# Altium PCB Front Power Distribution.PcbDoc (part 2 of 2)
Units mm, origin at the board's own origin, x right, y up, seen from the top; angles counter-clockwise.
Board outline 77 x 90 mm, 2 copper layers (Top Layer, Bottom Layer); 113 components, 89 nets, 463 pads, 547 vias.
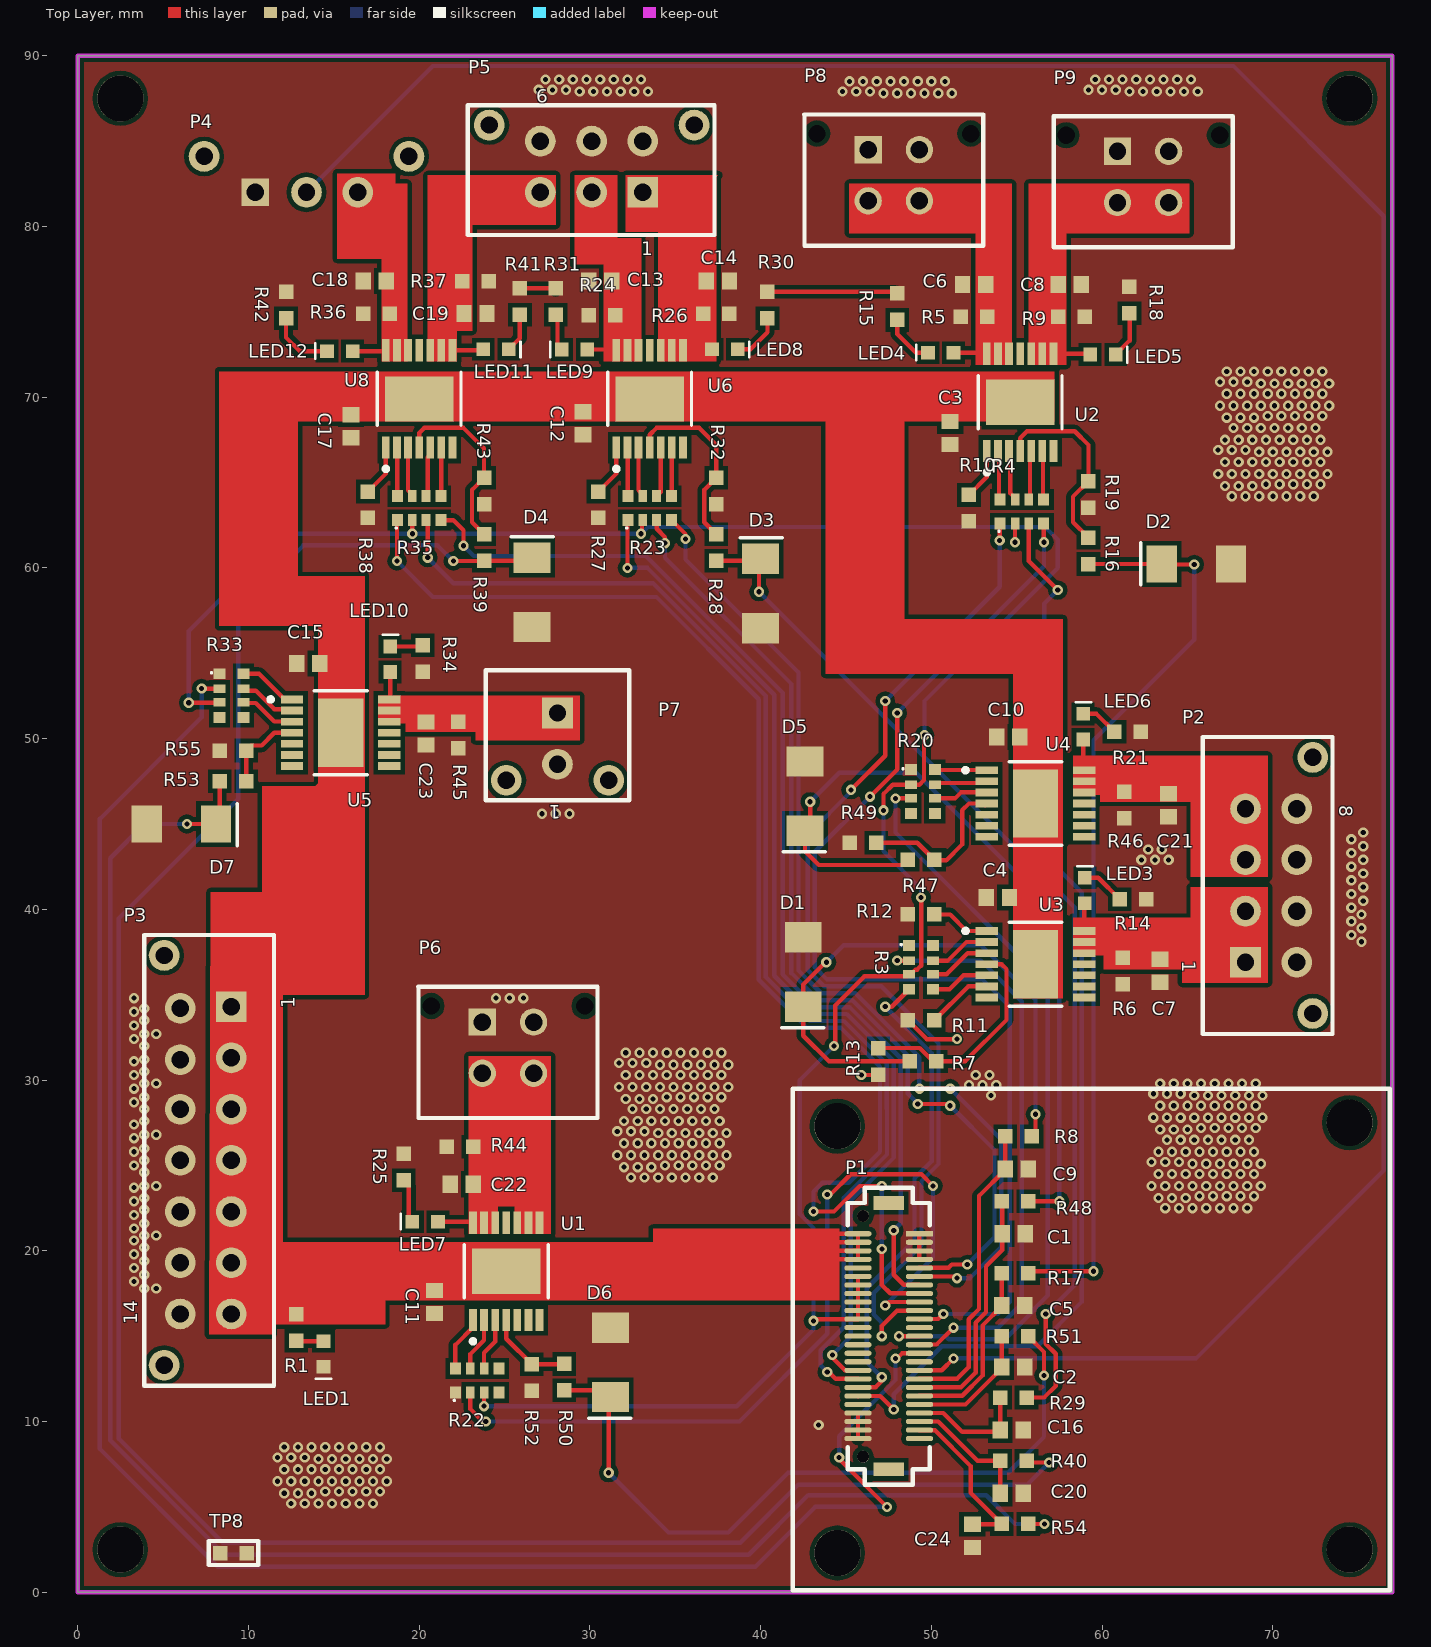
[diagram p0: Top Layer view]

## Via types
v1: diameter 0.6, hole 0.3, Top Layer to Bottom Layer, tented both sides, 547 vias

## Nets (pads, with @x,y where several pads share a name; then routed paths per layer and width w, separated by ;. In a path a pad name is that pad's centre, name@x,y a point inside that pad or via, vN(x,y) a via of type N, cw(c..) or ccw(c..) an arc to the next point about the centre after c; other vN are vias at no path point) (continued)
NetR16_2: (continued)
  Top Layer w0.254: U2.4 55.2,67.6 55.6,68 58.4,68 59.2,67.2 R19.1 58.3,64.175 58.3,62.675 R16.2
NetR20_6: R20.6 U4.3 | length 3.2
  Top Layer w0.254: R20.6 51.385,46.5 51.735,46.85 U4.3
NetR20_7: R20.7 U4.2 | length 3.1
  Top Layer w0.254: R20.7 50.302,47.402 53.152,47.402 U4.2
NetR20_8: R20.8 U4.1 | length 3.1
  Top Layer w0.254: R20.8 50.215,48.165 53.235,48.165 U4.1
NetR22_6: R22.6 U1.3 | length 3.1
  Top Layer w0.254: R22.6 23.8,14.035 24.45,14.685 U1.3
NetR22_7: R22.7 U1.2 | length 3.2
  Top Layer w0.254: R22.7 23,13.96 23.8,14.76 U1.2
NetR22_8: R22.8 U1.1 | length 3.3
  Top Layer w0.254: R22.8 22.12,14.49 23.15,15.52 U1.1
NetR23_5: R23.5 U6.6 | length 2.9
  Top Layer w0.254: R23.5 34.79,64.21 34.79,67.04 U6.6
NetR23_6: R23.6 U6.5 | length 3
  Top Layer w0.254: R23.6 34.15,64.45 U6.5
NetR23_7: R23.7 U6.3 | length 3
  Top Layer w0.254: U6.3 32.85,64.55 33.1,64.3 R23.7
NetR23_8: R23.8 U6.2 | length 2.9
  Top Layer w0.254: U6.2 32.21,67.04 32.21,64.21 R23.8
NetR27_1: R27.1 U6.1 | length 3
  Top Layer w0.254: R27.1 31.55,65.525 U6.1
NetR28_2: R28.2 R32.1 U6.4 | length 11
  Top Layer w0.254: U6.4 33.5,67.8 33.9,68.2 36.4,68.2 37.4,67.2 R32.1 36.696,64.571 36.696,62.679 R28.2
NetR33_6: R33.6 U5.3 | length 3.3
  Top Layer w0.254: R33.6 9.734,52.086 10.431,52.086 11.514,51.003 12.541,51.003 U5.3
NetR33_7: R33.7 U5.2 | length 3.4
  Top Layer w0.254: R33.7 9.809,52.811 10.431,52.811 11.514,51.728 12.466,51.728 U5.2
NetR33_8: R33.8 U5.1 | length 3.5
  Top Layer w0.254: R33.8 10.614,53.8 12.12,52.294 U5.1
NetR35_5: R35.5 U8.6 | length 2.9
  Top Layer w0.254: R35.5 21.29,64.21 21.29,67.04 U8.6
NetR35_6: R35.6 U8.5 | length 3
  Top Layer w0.254: R35.6 20.504,64.304 20.504,66.474 20.65,66.62 U8.5
NetR35_7: R35.7 U8.3 | length 3
  Top Layer w0.254: U8.3 19.35,64.55 19.6,64.3 R35.7
NetR35_8: R35.8 U8.2 | length 2.9
  Top Layer w0.254: U8.2 18.71,67.04 18.71,64.21 R35.8
NetR38_1: R38.1 U8.1 | length 3
  Top Layer w0.254: R38.1 18.05,65.525 U8.1
NetR39_2: R39.2 R43.1 U8.4 | length 10.9
  Top Layer w0.254: U8.4 20,67.9 20.3,68.2 22.6,68.2 23.8,67 R43.1 23.096,64.571 23.096,62.679 R39.2
NetR47_2: R47.2 R49.1 U4.4 | length 9.5
  Top Layer w0.254: R49.1 49.175,43.9 R47.2 ; R47.2@50.275,42.87 50.87,42.87 51.8,43.8 51.8,45.8 52.2,46.2 U4.4 U4.4@53.152,46.102
NetR50_2: R50.2 R52.1 U1.4 | length 5.1
  Top Layer w0.254: U1.4 25.1,14.85 R52.1 28.475,13.35 R50.2
NetR53_2: R53.2 R55.1 U5.4 | length 4.9
  Top Layer w0.254: R53.2 R55.1 10.173,49.598 10.773,49.598 11.514,50.339 12.544,50.339 U5.4
PA1_DVR_DISP_IS: C24.1 P1.24 R54.1 | length 9.8
  Top Layer w0.254: P1.24 49.309,9.491 50.209,9.491 52.3,7.4 52.3,5.825 R54.1@54.125,4 ; C24.1 54.104,3.975 R54.1
PA2_CTR_CSL_FAN_IS: C20.1 P1.23 R40.1 | length 7.6
  Top Layer w0.254: P1.23 50.4,10 52.7,7.7 R40.1 C20.1
PA3_STR_PDL_IS: C16.1 P1.22 R29.1 | length 7.1
  Top Layer w0.254: P1.22 50.7,10.5 51.8,9.4 C16.1@54.025,9.4 ; C16.1 R29.1
PA4_HORN_IS: C2.1 P1.21 R51.1 | length 7.6
  Top Layer w0.254: P1.21 52,11 C2.1@54.163,13.163 ; C2.1@54.125,13.15 C2.1 R51.1
PA5_FRONT_TURN_LIGHT_IS: C5.1 P1.20 R17.1 | length 10.7
  Top Layer w0.254: P1.20 49.309,11.509 51.809,11.509 53,12.7 53,15.625 54.125,16.75 C5.1 R17.1
PA6_DAYTIME_IS: C1.1 P1.19 R48.1 | length 14.3
  Top Layer w0.254: P1.19 49.309,12.009 51.735,12.009 52.594,12.868 52.594,15.794 53.2,16.4 53.2,19.1 54.15,20.05 C1.1 54.15,22.875 R48.1
PA7_PARK_LIGHT_IS: C9.1 P1.18 R8.1 | length 17.6
  Top Layer w0.254: P1.18 49.309,12.509 51.509,12.509 52.188,13.188 52.188,15.988 52.794,16.594 52.794,23.219 54.325,24.75 C9.1 R8.1
PA8_CENTER_CONSOLE_EN: P1.7 R35.4 | length 64.8
  Top Layer w0.254: R35.4 22,62.8 22.6,62.2 v1(22.6,61.3) ; v1(47.8,21.2) 47.8,18.594 48.385,18.009 49.291,18.009 P1.7
  Bottom Layer w0.254: v1(22.6,61.3) 23.2,60.7 33.274,60.7 41.3,52.674 41.3,36.19 43.214,34.276 45.213,34.276 48.213,31.276 48.213,21.613 v1(47.8,21.2)
PA9_PEDAL_EN: P1.6 R23.4 | length 58.4
  Top Layer w0.254: R23.4 35.6,61.98 v1(35.6,61.69) ; P1.6 51.4,18.5 v1(51.5,18.4) ; v1(49.3,29.5) v1(51.1,29.5)
  Bottom Layer w0.254: v1(35.6,61.69) 35.6,60.5 42.219,53.881 42.219,36.42 43.551,35.088 45.549,35.088 49.3,31.337 v1(49.3,29.5) ; v1(51.1,29.5) 54.1,26.5 54.1,20.237 52.263,18.4 v1(51.5,18.4)
PA10_STEERING_EN: P1.5 R23.3 | length 57.6
  Top Layer w0.254: R23.3 33.913,62.787 33.913,62.287 34.4,61.8 v1(34.4,61.45) ; v1(49.2,28.6) 51,28.6 v1(51.1,28.5) ; P1.5 49.309,19.009 51.009,19.009 51.2,19.2 v1(52.1,19.2)
  Bottom Layer w0.254: v1(34.4,61.45) 34.4,60.6 41.8,53.2 41.8,36.264 43.382,34.682 45.381,34.682 48.619,31.444 48.619,29.218 49.2,28.637 v1(49.2,28.6) ; v1(51.1,28.5) 53.694,25.906 53.694,20.794 v1(52.1,19.2)
Park_Light_PWR: C7.1 LED3.1 P2.1 P2.2 R6.1 U3.12 U3.13 U3.14 | length 1.6
  Top Layer w0.254: U3.14 58.95,40.31 LED3.1
PB0_FAN_PWM: P1.17 P4.2 | length 157.8
  Top Layer w0.254: P1.17 49.309,13.009 50.609,13.009 v1(51.3,13.7)
  Bottom Layer w0.254: P4.2 20.8,89.4 67.7,89.4 76.5,80.6 76.5,24.7 65.5,13.7 v1(51.3,13.7)
PB2_DVR_DISP_EN: P1.15 R33.2 | length 111.2
  Top Layer w0.254: v1(7.26,52.94) 7.28,52.92 R33.2 ; v1(44.6,7.9) 44.6,7.8 v1(47.4,5) ; v1(47.9,13.7) 47.994,13.7 48.285,13.991 49.291,13.991 P1.15
  Bottom Layer w0.254: v1(7.26,52.94) 7.26,51.26 1.3,45.3 1.3,8.4 8.2,1.5 39.7,1.5 43.2,5 v1(47.4,5) ; v1(44.6,7.9) 44.6,9.137 47.9,12.437 v1(47.9,13.7)
PB6_STR_PDL_DSEL: P1.34 R23.1 | length 60.7
  Top Layer w0.254: v1(32.2,60) 32.2,62.78 R23.1 ; v1(44.2,13.9) 44.266,13.834 44.266,13.677 44.935,13.009 45.691,13.009 P1.34
  Bottom Layer w0.254: v1(32.2,60) 33.374,60 40.801,52.573 40.801,36.115 43.046,33.87 45.044,33.87 47.8,31.114 47.8,28.503 47.806,28.497 47.806,25.469 45.269,22.932 45.269,14.969 v1(44.2,13.9)
PB7_CTR_CSL_FAN_DSEL: P1.33 R35.3 | length 72.8
  Top Layer w0.254: R35.3 20.5,62.7 v1(20.5,60.6) ; v1(43.9,12.9) 43.994,12.9 44.394,12.5 P1.33
  Bottom Layer w0.254: v1(20.5,60.6) 22,59.1 33.7,59.1 40.3,52.5 40.3,36.042 42.878,33.464 44.876,33.464 47.394,30.946 47.394,28.335 47.4,28.329 47.4,25.637 44.863,23.1 44.863,15.526 43.519,14.182 43.519,13.281 v1(43.9,12.9)
PB8_PARK_LIGHT_DSEL: P1.32 R3.4 | length 28.4
  Top Layer w0.254: P1.32 45.709,12.009 46.734,12.009 47.125,12.4 47.125,12.575 v1(47.1,12.6) ; v1(47.3,34.3) 47.68,34.3 R3.4
  Bottom Layer w0.254: v1(47.1,12.6) 46.213,13.487 46.213,17.813 49.013,20.613 49.013,24.25 50.013,25.25 50.013,31.587 v1(47.3,34.3)
PB9_FRONT_TURN_LIGHT_DSEL: P1.31 R4.3 | length 64.1
  Top Layer w0.254: P1.31@45.709,11.491 P1.31 47,11.5 v1(47.8,10.7) ; R4.3 55.7,60.4 v1(57.4,58.7)
  Bottom Layer w0.254: v1(47.8,10.7) 47.8,11.6 50.613,14.413 56.213,14.413 58.8,17 58.8,41 56.612,43.188 56.612,57.912 v1(57.4,58.7)
PB10_PARK_LIGHT_EN: P1.14 R3.2 | length 33.7
  Top Layer w0.254: v1(48,37) R3.2 ; P1.14 49.309,14.509 50.309,14.509 v1(51.3,15.5)
  Bottom Layer w0.254: v1(48,37) 52.9,37 55.3,34.6 55.3,16.9 53.9,15.5 v1(51.3,15.5)
PB11_DAYTIME_EN: P1.13 R20.3 | length 44.8
  Top Layer w0.254: v1(47.9,46.5) R20.3 ; v1(48.1,15) P1.13
  Bottom Layer w0.254: v1(47.9,46.5) 47.9,44.5 56.819,35.581 56.819,17.382 56.019,16.582 56.019,16.519 54.319,14.819 51.018,14.819 50.837,15 v1(48.1,15)
PB12_FRONT_RIGHT_TURN_EN: P1.11 R4.4 | length 67
  Top Layer w0.254: v1(46.4,46.6) 48,48.2 v1(48,51.5) ; P1.11 49.309,16.009 50.409,16.009 v1(50.7,16.3) ; R4.4 56.59,62.59 56.59,61.51 v1(56.6,61.5)
  Bottom Layer w0.254: v1(46.4,46.6) 43.169,43.369 43.169,36.618 43.887,35.9 53,35.9 54.6,34.3 54.6,17 53.9,16.3 v1(50.7,16.3) ; v1(48,51.5) 56.6,60.1 v1(56.6,61.5)
PB13_FRONT_LEFT_TURN_EN: P1.10 R4.1 | length 62.3
  Top Layer w0.254: v1(45.3,47) 47.3,49 v1(47.3,52.2) ; v1(47.1,15) 47.1,15.6 47.991,16.491 49.291,16.491 P1.10 ; v1(54,61.6) 54.01,61.61 54.01,62.59 R4.1
  Bottom Layer w0.254: v1(45.3,47) 45.3,46.9 42.763,44.363 42.763,36.45 43.719,35.494 47.069,35.494 50.419,32.144 50.419,25.082 49.419,24.082 49.419,20.319 46.619,17.519 46.619,16.281 47.1,15.8 v1(47.1,15) ; v1(47.3,52.2) 54,58.9 v1(54,61.6)
PB14_HORN_EN: P1.9 R22.2 | length 49.7
  Top Layer w0.254: R22.2 23,10.737 23.671,10.066 23.834,10.066 v1(23.9,10) ; v1(43.9,23.3) 44.1,23.3 45.281,24.481 49.419,24.481 v1(50.1,23.8) ; v1(47.3,16.8) 47.5,17 P1.9
  Bottom Layer w0.254: v1(23.9,10) 38.763,10 43.9,15.137 v1(43.9,23.3) ; v1(47.3,16.8) 50.1,19.6 v1(50.1,23.8)
PB15_FAN_EN: P1.8 R35.1 | length 76.4
  Top Layer w0.254: v1(18.7,60.4) 18.7,62.78 R35.1 ; v1(43.1,22.3) 44.3,22.3 45.8,23.8 v1(47.1,23.8) ; v1(47.1,20.1) 47.1,18 47.591,17.509 49.291,17.509 P1.8
  Bottom Layer w0.254: v1(18.7,60.4) 20.8,58.3 33.9,58.3 39.894,52.306 39.894,35.874 42.71,33.058 44.708,33.058 46.988,30.778 46.988,25.799 45.17,23.981 43.618,23.981 43.219,23.582 43.219,23.571 43.1,23.452 v1(43.1,22.3) ; v1(47.1,20.1) v1(47.1,23.8)
Pedal_PWR: C13.1 LED9.1 P5.2 R24.1 U6.12 U6.13 U6.14 | length 1.7
  Top Layer w0.254: LED9.1 31.51,72.79 U6.14
Steering_PWR: C14.1 LED8.1 P5.1 R26.1 U6.8 U6.9 U6.10 | length 1.7
  Top Layer w0.254: U6.8 37.09,72.75 LED8.1
VBAT: C3.1 C4.1 C10.1 C11.1 C12.1 C15.1 C17.1 P1.47 P1.48 P1.49 P1.50 P3.1 P3.2 P3.3 P3.4 P3.5 P3.6 P3.7 R1.1 U1.15 U2.15 U3.15 U4.15 U5.15 U6.15 U8.15 | length 10.5
  Top Layer w0.254: 43.4,20.5 P1.49 ; 43.4,21.1 43.5,21 P1.50 P1.49 ; 43.5,19.6 43.6,19.5 P1.47 P1.48 ; 43.6,20.1 43.7,20 P1.48 ; P1.48 P1.49
pads on no net: P1. P1.12 P1.16 P1.25 P1.30 P1.35 P1.36 P1.37 P1.38 P1.39 P1.46 P2.0 P3.0 P4.0 P5.0 P6. P7.0 P8. P9. R3.1 R3.8 R20.4 R20.5 R22.4 R22.5 R33.4 R33.5 U1.5 U1.6 U1.7 U1.11 U2.7 U2.11 U3.7 U3.8 U3.9 U3.10 U3.11 U4.5 U4.6 U4.7 U4.8 U4.9 U4.10 U4.11 U5.5 U5.6 U5.7 U5.8 U5.9 U5.10 U5.11 U6.7 U6.11 U8.7 U8.11

## Polygon pours and split planes (outlines as drawn)
GND on Bottom Layer "Bottom Layer-No Net" (solid, pour order 0): 0,90 0,0 77,0 77,90
GND on Top Layer "Top Layer-No Net" (solid, pour order 10): 0,0 77,0 77,90 0,90

## Keep-outs
Keep-Out Layer:
  the board outline again, w0.254

## Other copper
Top Layer:
  region net VBAT: 54.8,34.8 57.7,34.8 57.7,57 48.4,57 48.4,68.7 43.8,68.7 43.8,53.8 54.8,53.8
  region net VBAT: 44.6,20.5 44.6,21.3 33.7,21.3 33.7,20.5
  region net VBAT: 7.7,15.1 11.4,15.1 11.4,15.7 18,15.7 18,17.1 44.6,17.1 44.6,20.5 12,20.5 12,35 16.8,35 16.8,59.5 12.9,59.5 12.9,68.6 57.2,68.6 57.2,71.5 8.3,71.5 8.3,56.6 14.1,56.6 14.1,47.4 13.9,47.2 10.8,47.2 10.8,41 7.8,41
  region net Park_Light_PWR: 58.3,37.3 60.1,37.3 60.1,36.5 64.7,36.5 64.7,35.7 69.7,35.7 69.7,41.3 65.2,41.3 65.2,39.5 58.3,39.5
  region net Daytime_PWR: 58.3,49 58.3,46.7 59.9,46.7 59.9,46.3 65.2,46.3 65.2,41.9 69.7,41.9 69.7,49
  region net Front_Right_Turn_Light_PWR: 55.7,71.9 57.9,71.9 57.9,79.6 65.1,79.6 65.1,82.5 55.7,82.5
  region net Front_Left_Turn_Light_PWR: 45.2,82.5 45.2,79.6 52.6,79.6 52.6,71.9 54.7,71.9 54.7,82.5
  region net Steering_PWR: 32.1,83 37.5,83 37.4,82.9 37.4,72.1 34,72.1 34,79.7 32.1,79.7
  region net Pedal_PWR: 29.1,83 29.1,77.8 30.8,77.8 30.8,72.1 33,72.1 33,79.3 31.6,79.3 31.6,80.4 31.6,83
  region net Center_Console_PWR: 20.5,72.1 22.2,72.1 22.2,73.9 23.1,73.9 23.1,80.1 28,80.1 28,83 20.5,83
  region net Fan_PWR: 15.2,83.1 18.6,83.1 18.6,82.5 19.3,82.5 19.3,72.1 17.8,72.1 17.8,78.1 15.2,78.1
  region net Driver_Display_PWR: 17.6,52.5 29.4,52.5 29.4,49.9 23.3,49.9 23.3,50.4 19.2,50.4 19.2,50.9 17.6,50.9
  region net Horns_PWR: 25.6,21 25.6,22.6 24.6,22.6 24.6,21 22.9,21 22.9,31.4 27.7,31.4 27.7,21
  region: 24.5,21.3

## Silkscreen, mask and mechanical layers (free items; w line width, h text height)
Top Overlay:
  lines w0.254: 41.889,0.127 41.889,29.492 76.842,29.492 76.842,0.127 41.889,0.127

## Text inside footprints (layer, text, board x,y; h text height)
P2: Top Overlay "1" at 64.7,37 h0.8 r270; Top Overlay "8" at 73.9,46.1 h0.8 r270
P3: Top Overlay "1" at 12.7,34.2 h0.8 r90; Top Overlay "14" at 3.5,15.7 h0.8 r90
P5: Top Overlay "6" at 26.85,87.25 h0.8; Top Overlay "1" at 33,78.3 h0.8
P7: Top Overlay "1" at 28.3,46.1 h0.8 r180